# Altium PCB PCB_Control Decoder_2021-12-04.pcbdoc
Units mm, origin at the board's own origin, x right, y up, seen from the top; angles counter-clockwise.
Board outline 124.59 x 83.95 mm, 2 copper layers (Top Layer, Bottom Layer); 14 components, 39 nets, 114 pads, 15 vias.
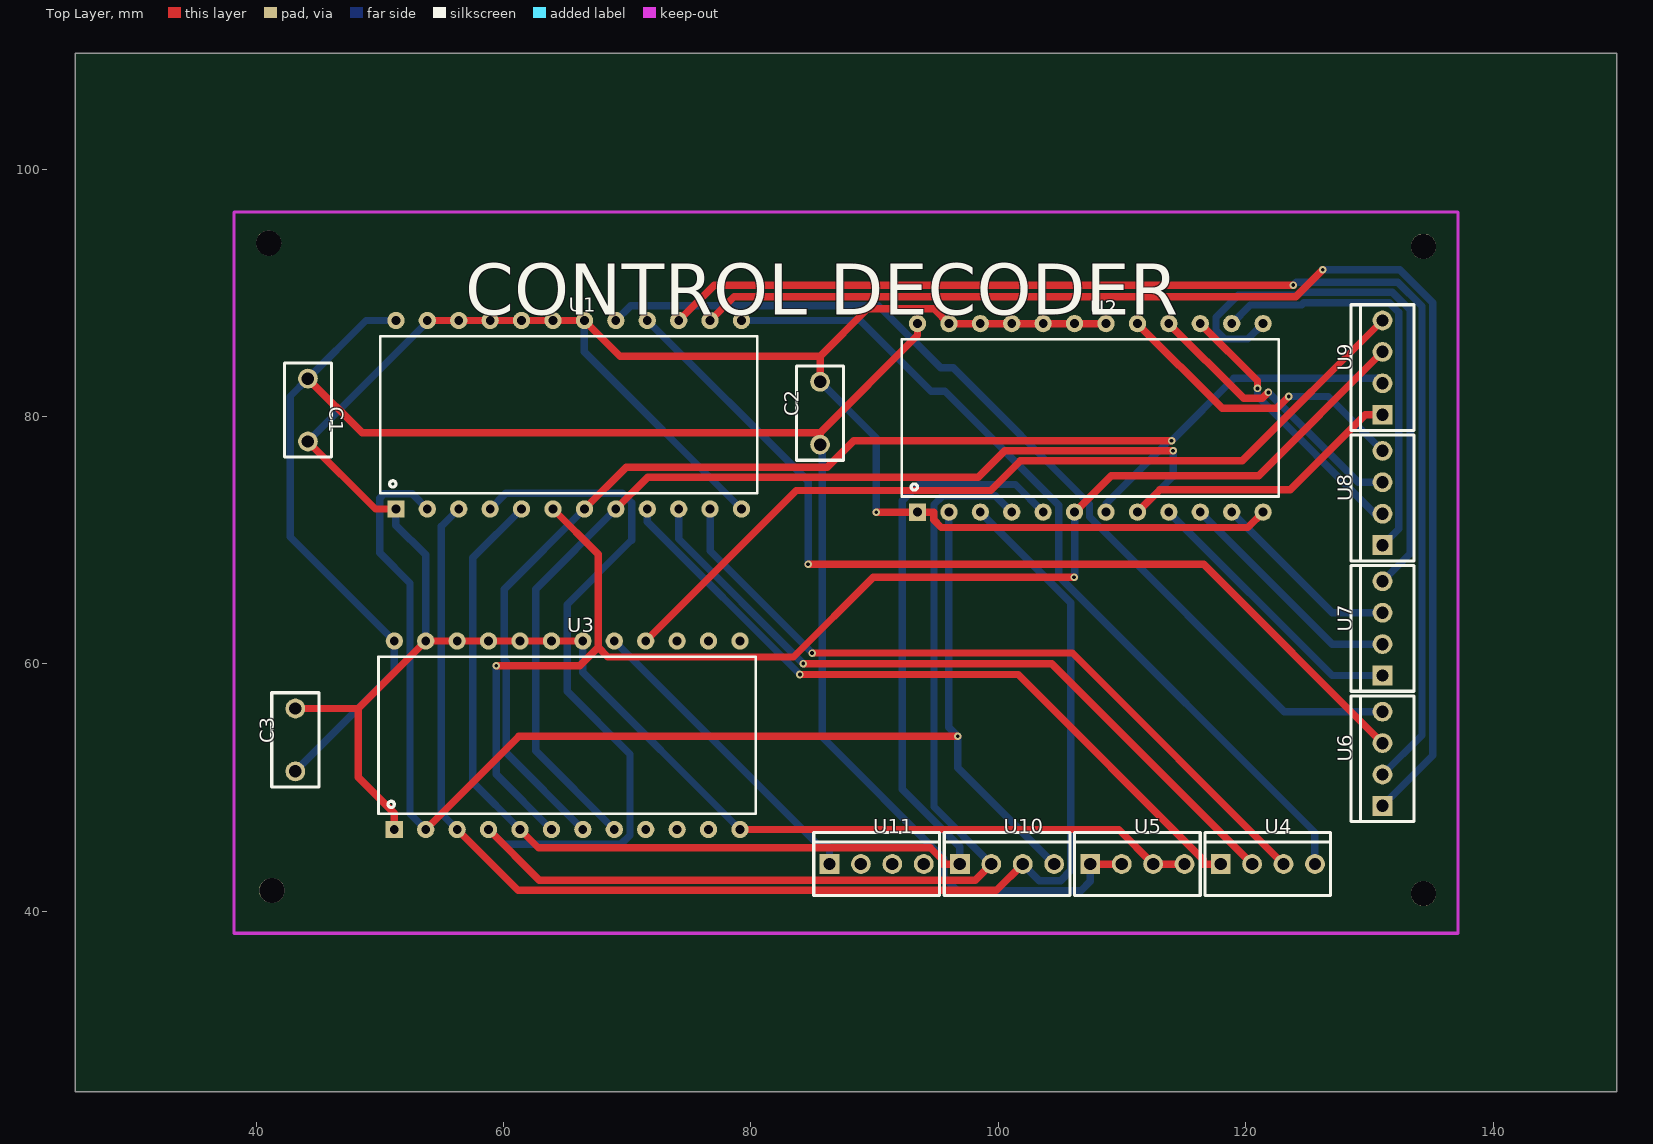
[diagram p0: Top Layer view]
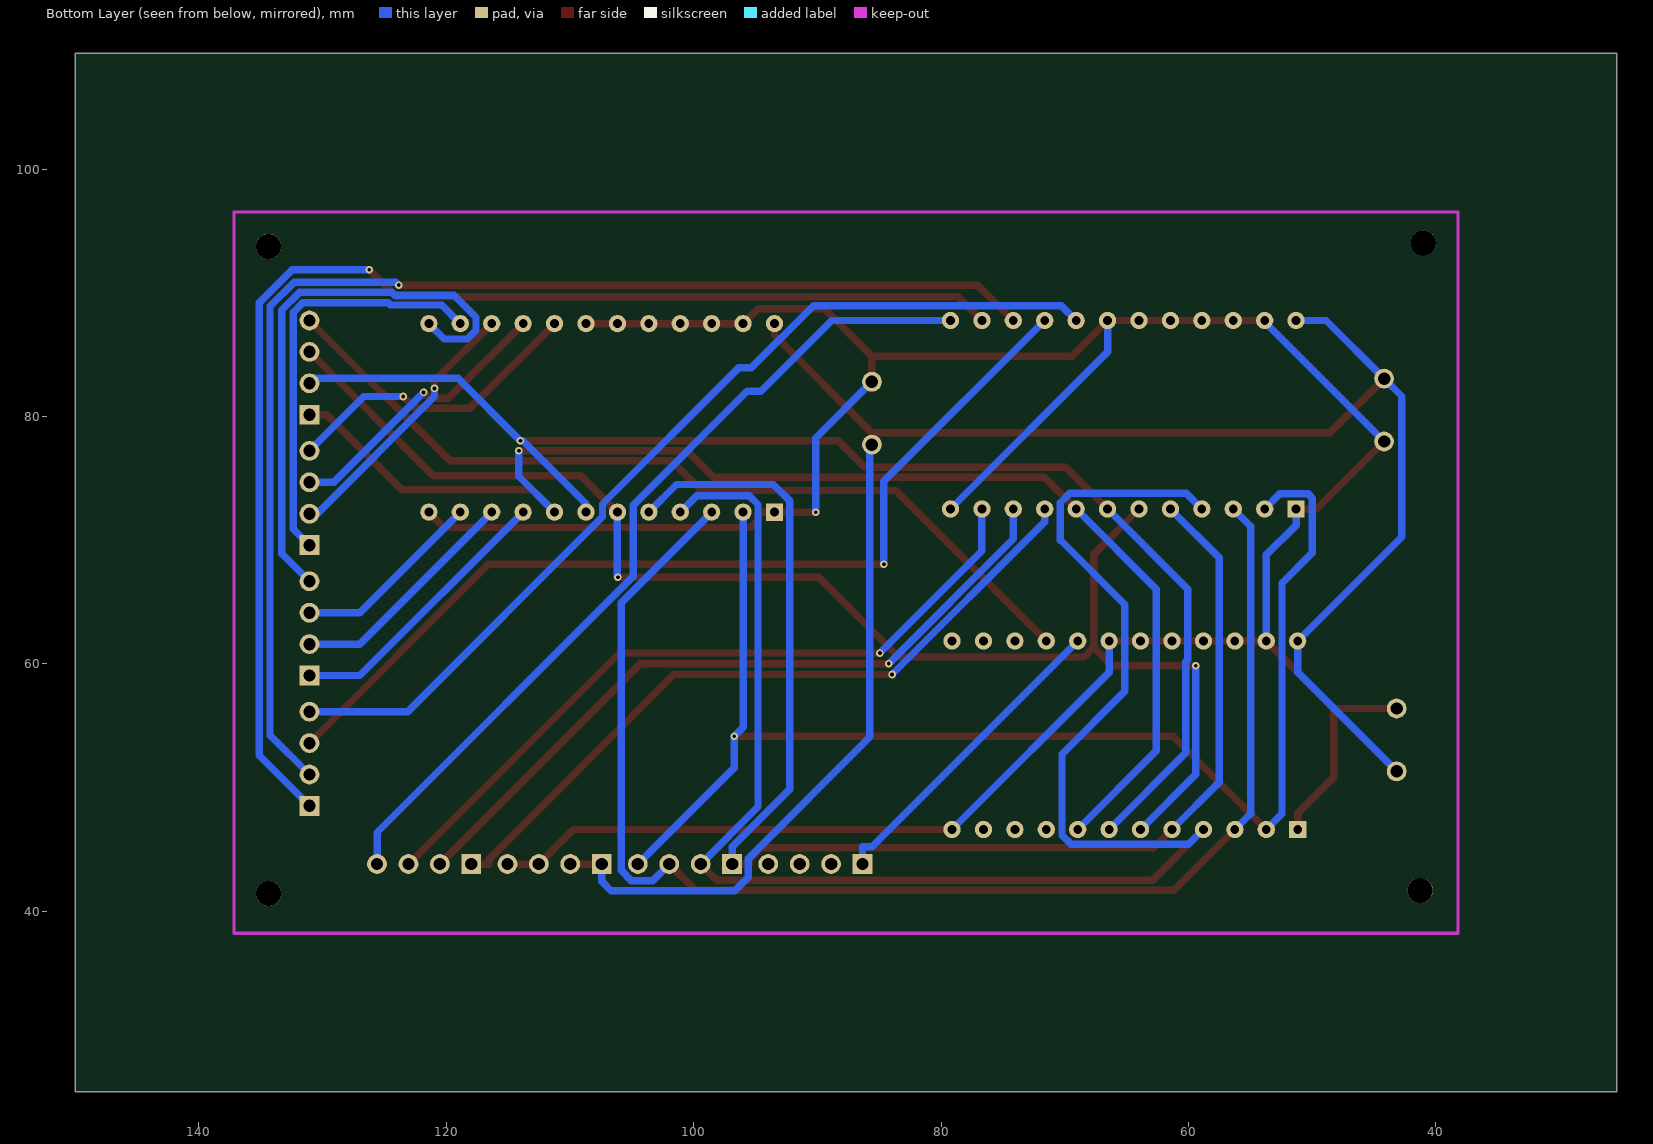
[diagram p1: Bottom Layer view, seen from below]

## Layer stack, top to bottom
Top Layer: signal copper (thickness not stored)
Dielectric: dielectric 0.32, FR-4, Dk 4.8
Bottom Layer: signal copper (thickness not stored)

## Board outline
149.987,25.4 25.4,25.4 25.4,109.347 149.987,109.347

## Components (designator, comment, footprint, x,y, rotation, side; value= is the part's Value field where it differs from the comment)
C1 "100nF 63V poli7" CAP-TH_L7.6-W3.8-P5.08-D0.51 44.196,80.518 r270 top
C2 "100nF 63V poli" CAP-TH_L7.6-W3.8-P5.08-D0.51 85.598,80.264 r90 top
C3 "100nF 63V poli" CAP-TH_L7.6-W3.8-P5.08-D0.51 43.18,53.848 r90 top
U1 "CAT28C16AL-20" DIP24-600 65.278,80.137 r0 top
U2 "CAT28C16AL-20" DIP24-600 107.442,79.883 r0 top
U3 "CAT28C16AL-20" DIP24-600 65.151,54.229 r0 top
U4 "SINAIS OUT" HDR-TH_4P-P2.54-D1.0 121.793,43.815 r0 top
U5 "ALIM." HDR-TH_4P-P2.54-D1.0 111.252,43.815 r0 top
U6 "SINAIS OUT" HDR-TH_4P-P2.54-D1.0 131.064,52.324 r90 top
U7 "SINAIS OUT" HDR-TH_4P-P2.54-D1.0 131.064,62.865 r90 top
U8 "SINAIS OUT" HDR-TH_4P-P2.54-D1.0 131.064,73.406 r90 top
U9 "SINAIS OUT" HDR-TH_4P-P2.54-D1.0 131.064,83.947 r90 top
U10 "SINAIS OUT" HDR-TH_4P-P2.54-D1.0 100.711,43.815 r0 top
U11 "SINAIS OUT" HDR-TH_4P-P2.54-D1.0 90.17,43.815 r0 top

## Footprints (in the part's own frame and the unit in brackets; to place one, negate y for a bottom-side part, rotate by r counter-clockwise, add the part's x,y. Pads: shape width x height; smd on the part's side, far side on the other; paste and mask are expansions set on the pad)
CAP-TH_L7.6-W3.8-P5.08-D0.51 [mm]
  round 1.6 hole 1: 1(-2.54,0) 2(2.54,0)
  silkscreen extent -3.81,-1.91 3.81,1.91
DIP24-600 [mil]
  rect 55x55 hole 28: 1(-550,-300)
  round 55 hole 28: 2(-450,-300) 3(-350,-300) 4(-250,-300) 5(-150,-300) 6(-50,-300) 7(50,-300) 8(150,-300) 9(250,-300) 10(350,-300) 11(450,-300) 12(550,-300) 13(550,300) 14(450,300) 15(350,300) 16(250,300) 17(150,300) 18(50,300) 19(-50,300) 20(-150,300) 21(-250,300) 22(-350,300) 23(-450,300) 24(-550,300)
  silkscreen extent -600,-250 600,250
HDR-TH_4P-P2.54-D1.0 [mm]
  rect 1.6x1.6 hole 1: 1(-3.81,0)
  round 1.6 hole 1: 2(-1.27,0) 3(1.27,0) 4(3.81,0)
  silkscreen extent -5.08,-2.54 5.08,2.54

## Free pads (board coordinates)
  round 2.032 hole 2.032 unplated: ""(41.026,94.005) ""(41.28,41.681) ""(134.371,41.427) ""(134.371,93.751)

## Via types
v1: diameter 0.61, hole 0.305, Top Layer to Bottom Layer, 15 vias

## Nets (pads, with @x,y where several pads share a name; then routed paths per layer and width w, separated by ;. In a path a pad name is that pad's centre, name@x,y a point inside that pad or via, vN(x,y) a via of type N, cw(c..) or ccw(c..) an arc to the next point about the centre after c; other vN are vias at no path point)
+5V: C1.1 C2.1 C3.1 U1.24 U2.24 U3.24 U5.1 U5.2 | length 160.1
  Top Layer w0.6: C1.1 48.578,78.676 85.598,78.676 ; C2.1 85.598,78.676 ; U2.24 93.472,86.55 85.598,78.676 ; U5.1 U5.2
  Bottom Layer w0.6: C3.1 51.181,59.309 U3.24 42.751,70.279 42.751,81.613 C1.1 48.895,87.757 U1.24 ; C2.1 85.761,77.561 85.761,54.086 95.598,44.248 95.598,42.747 96.687,41.659 106.687,41.659 107.442,42.413 U5.1
GND: C1.2 C2.2 C3.2 U1.1 U1.12 U1.18 U1.19 U1.20 U1.21 U1.22 U1.23 U2.1 U2.12 U2.18 U2.19 U2.20 U2.21 U2.22 U2.23 U3.1 U3.12 U3.18 U3.19 U3.20 U3.21 U3.22 U3.23 U5.3 U5.4 | length 254.7
  Top Layer w0.6: C3.2 48.26,56.388 ; C1.2 49.657,72.517 U1.1 ; U3.1 51.181,47.909 48.26,50.83 48.26,56.388 ; U1.23 U1.22 U1.21 U1.20 U1.19 U1.18 69.424,84.881 85.598,84.881 ; U3.18 U3.19 U3.20 U3.21 U3.22 U3.23 48.26,56.388 ; U3.12 109.728,46.609 U5.3 U5.4 ; C2.2 85.598,84.881 ; v1(90.144,72.263) U2.1 94.122,72.263 94.772,72.263 94.772,71.643 95.391,71.024 120.173,71.024 U2.12 ; U2.18 U2.19 U2.20 U2.21 U2.22 U2.23 94.804,88.711 89.428,88.711 85.598,84.881
  Bottom Layer w0.6: C1.2 53.848,87.63 U1.23 ; U1.1 51.308,71.217 53.721,68.804 U3.23 ; U3.18 66.421,59.309 U3.12 ; U1.18 66.548,85.217 U1.12 ; C2.2 90.144,78.258 v1(90.144,72.263)
S$31: 
S$33: 
S$35: 
U1_2: U1.2 U2.2 U3.2 U10.4 | length 110.9
  Top Layer w0.6: U3.2 61.255,54.143 v1(96.734,54.143)
  Bottom Layer w0.6: U3.2 52.451,47.879 52.451,66.529 49.989,68.991 49.989,73.392 50.337,73.74 52.625,73.74 U1.2 ; U2.2 96.012,54.866 v1(96.734,54.143) 96.734,51.602 U10.4
U1_3: U1.3 U2.3 U3.3 U10.3 | length 112.4
  Top Layer w0.6: U3.3 61.179,41.691 99.857,41.691 U10.3
  Bottom Layer w0.6: U3.3 54.991,47.879 54.991,71.12 U1.3 ; U2.3 105.865,64.95 105.865,43.301 105.04,42.477 103.319,42.477 U10.3
U1_4: U1.4 U2.4 U3.4 U10.2 | length 136.6
  Top Layer w0.6: U3.4 62.898,42.512 98.138,42.512 U10.2
  Bottom Layer w0.6: U3.4 60.009,45.401 69.479,45.401 70.231,46.153 70.231,52.706 65.151,57.786 65.151,64.8 70.358,70.007 70.358,73.041 69.62,73.779 60.19,73.779 U1.4 ; U10.2 94.81,48.446 94.81,72.878 95.527,73.595 99.76,73.595 U2.4
U1_5: U1.5 U2.5 U3.5 U10.1 | length 110.2
  Top Layer w0.6: U3.5 62.833,45.117 94.523,45.117 95.499,44.141 95.499,43.815 U10.1
  Bottom Layer w0.6: U3.5 57.531,50.419 57.531,68.58 U1.5 ; U10.1 96.901,45.217 92.253,49.865 92.253,73.179 93.571,74.498 101.397,74.498 U2.5
U1_6: U1.6 U2.6 U3.6 U9.3 | length 113.6
  Top Layer w0.6: v1(59.418,59.852) 66.186,59.852 67.666,61.332 ; U1.6 67.666,68.859 67.666,61.332 ; v1(106.128,67.003) 89.901,67.003 83.448,60.551 68.447,60.551 67.666,61.332 ; U2.6 109.126,75.217 121.064,75.217 U9.3
  Bottom Layer w0.6: v1(59.418,59.852) 59.418,51.072 U3.6 ; v1(106.128,67.003) 106.172,67.047 U2.6
U1_7: U1.7 U2.7 U3.7 U9.2 | length 108.4
  Top Layer w0.6: U1.7 69.927,75.896 86.184,75.896 88.329,78.041 v1(114.016,78.041)
  Bottom Layer w0.6: U3.7 60.225,52.805 60.225,60.186 60.071,60.341 60.071,66.04 U1.7 ; U2.7 108.712,72.951 113.802,78.041 v1(114.016,78.041) 119.045,83.07 130.671,83.07 U9.2
U1_8: U1.8 U2.8 U3.8 U9.1 | length 107.4
  Top Layer w0.6: U1.8 71.664,75.093 98.399,75.093 100.535,77.229 v1(114.131,77.229) ; U2.8 113.073,74.084 123.609,74.084 129.662,80.137 U9.1
  Bottom Layer w0.6: U3.8 62.611,52.959 62.611,66.04 U1.8 ; U2.8 114.131,75.142 v1(114.131,77.229)
U1_9: U1.9 U4.1 | length 59.1
  Top Layer w0.6: v1(83.972,59.138) 101.609,59.138 116.581,44.165 116.581,43.815 U4.1
  Bottom Layer w0.6: U1.9 71.628,71.482 v1(83.972,59.138)
U1_10: U1.10 U4.2 | length 59.7
  Top Layer w0.6: v1(84.236,60.024) 104.314,60.024 U4.2
  Bottom Layer w0.6: U1.10 74.168,70.091 v1(84.236,60.024)
U1_11: U1.11 U4.3 | length 60.2
  Top Layer w0.6: v1(84.953,60.874) 106.004,60.874 U4.3
  Bottom Layer w0.6: U1.11 76.708,69.12 v1(84.953,60.874)
U1_13: U1.13 U4.4 | length 69.4
  Bottom Layer w0.6: U1.13 88.845,87.757 94.564,82.038 95.699,82.038 104.902,72.834 104.902,67.068 125.603,46.367 U4.4
U1_14: U1.14 U6.1 | length 103.6
  Top Layer w0.6: U1.14 78.637,89.686 124.065,89.686 v1(126.235,91.857)
  Bottom Layer w0.6: v1(126.235,91.857) 132.458,91.857 135.138,89.176 135.138,52.588 U6.1
U1_15: U1.15 U6.2 | length 101.3
  Top Layer w0.6: U1.15 77.03,90.619 v1(123.855,90.619)
  Bottom Layer w0.6: v1(123.855,90.619) 124.083,90.846 132.305,90.846 134.253,88.897 134.253,54.243 U6.2
U1_16: U1.16 U6.3 | length 77.5
  Top Layer w0.6: v1(84.632,68.047) 116.611,68.047 U6.3
  Bottom Layer w0.6: U1.16 84.632,74.753 v1(84.632,68.047)
U1_17: U1.17 U6.4 | length 76.7
  Bottom Layer w0.6: U1.17 70.289,88.958 90.319,88.958 95.349,83.928 96.365,83.928 107.375,72.918 107.375,71.88 123.121,56.134 U6.4
U2_9: U2.9 U7.1 | length 22.7
  Bottom Layer w0.6: U2.9 127,59.055 U7.1
U2_10: U2.10 U7.2 | length 19.2
  Bottom Layer w0.6: U2.10 127,61.595 U7.2
U2_11: U2.11 U7.3 | length 15.6
  Bottom Layer w0.6: U2.11 127,64.135 U7.3
U2_13: U2.13 U7.4 | length 45.7
  Bottom Layer w0.6: U2.13 120.168,86.259 118.319,86.259 117.602,86.976 117.602,88.032 119.382,89.812 124.19,89.812 124.421,90.043 131.866,90.043 133.306,88.603 133.306,68.917 U7.4
U2_14: U2.14 U8.1 | length 33.9
  Bottom Layer w0.6: U2.14 120.378,89.009 124.522,89.009 124.688,89.175 131.598,89.175 132.367,88.406 132.367,70.899 U8.1
U2_15: U2.15 U8.2 | length 21.8
  Top Layer w0.6: U2.15 120.96,82.875 v1(120.96,82.263)
  Bottom Layer w0.6: v1(120.96,82.263) 120.96,81.627 130.45,72.136 U8.2
U2_16: U2.16 U8.3 | length 23
  Top Layer w0.6: U2.16 119.84,81.455 121.35,81.455 v1(121.838,81.943)
  Bottom Layer w0.6: v1(121.838,81.943) 129.106,74.676 U8.3
U2_17: U2.17 U8.4 | length 24.9
  Top Layer w0.6: U2.17 118.103,80.652 122.53,80.652 v1(123.49,81.612)
  Bottom Layer w0.6: v1(123.49,81.612) 126.668,81.612 U8.4
U3_9: U3.9
U3_10: U3.10
U3_11: U3.11
U3_13: U3.13
U3_14: U3.14
U3_15: U3.15
U3_16: U3.16 U9.4 | length 70.3
  Top Layer w0.6: U3.16 83.665,74.013 99.388,74.013 101.796,76.421 119.728,76.421 U9.4
U3_17: U3.17 U11.1 | length 25.7
  Bottom Layer w0.6: U3.17 85.593,45.217 86.36,45.217 U11.1
U11_2: U11.2
U11_3: U11.3
U11_4: U11.4

## Silkscreen, mask and mechanical layers (free items; w line width, h text height)
Top Overlay:
  text "CONTROL DECODER" at 56.896,88.226 h4.14
Document:
  lines w0.003: 87.668,67.348 87.719,67.399